# Altium PCB a1200_keyboard_adapter.PcbDoc
Units mil, origin at the board's own origin, x right, y up, seen from the top; angles counter-clockwise.
Board outline 1181.1 x 984.25 mil, 2 copper layers (Top Layer, Bottom Layer); 5 components, 9 nets, 63 pads, 4 vias.
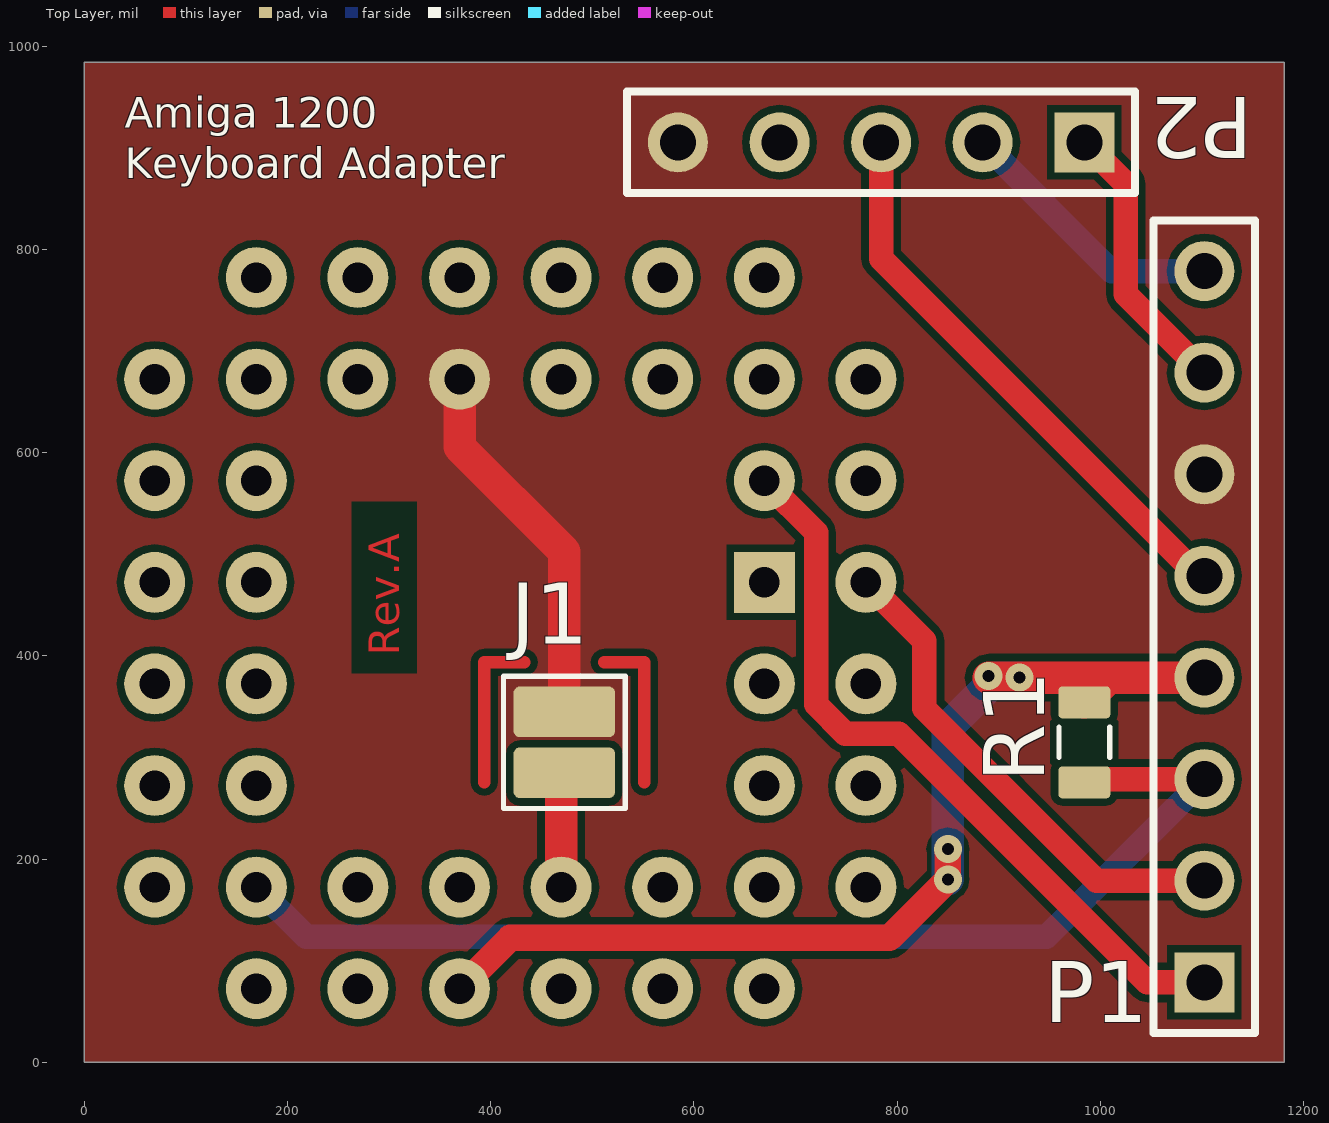
[diagram p0: Top Layer view]
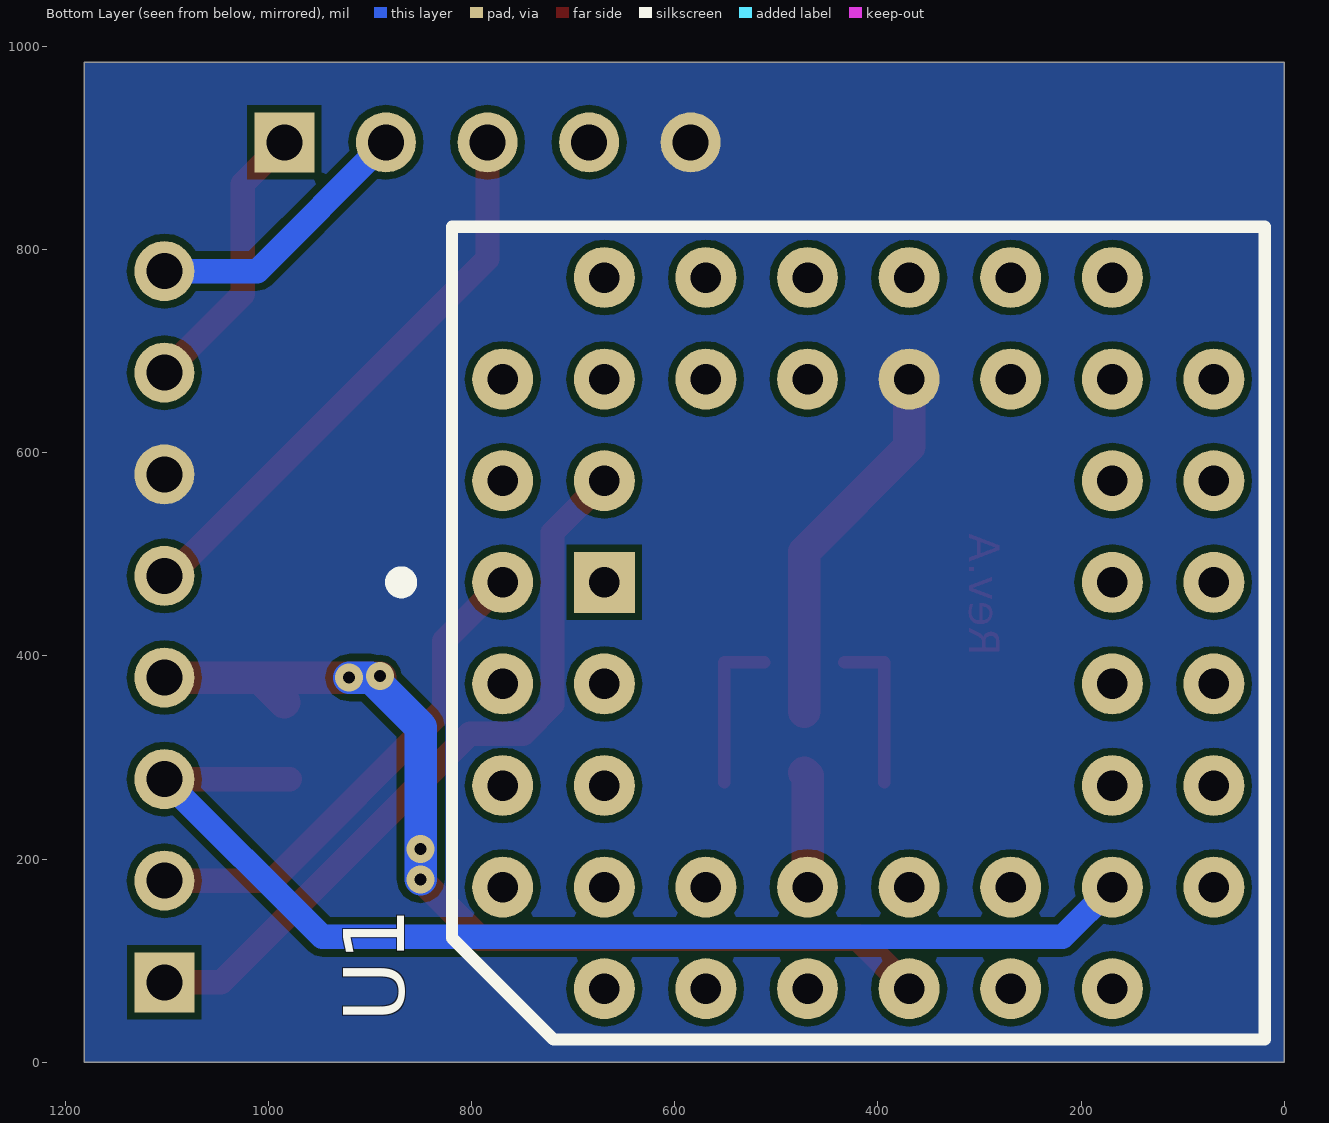
[diagram p1: Bottom Layer view, seen from below]

## Layer stack, top to bottom
Top Layer: signal copper 1.4
Dielectric: dielectric 12.6, FR-4, Dk 4.8
Bottom Layer: signal copper 1.4

## Board outline
0,0 0,984.25 1181.1,984.25 1181.1,0

## Design rules (kind name [scope] priority, off if disabled: settings)
Clearance [All] p1: gap=7
PolygonConnect [All] p1: connectstyle=Direct reliefconductorwidth=10 reliefentries=4 polygonreliefangle="90 Angle"
RoutingVias [All] p1: holewidth=28 width=50 viastyle="Through Hole" minholewidth=28 minwidth=50 maxholewidth=28 maxwidth=50
SilkscreenOverComponentPads [All] p1: minsilkscreentomaskgap=10
SolderMaskExpansion [All] p1: expansion=4
Width [All] p1: maxlimit=32 minlimit=10 preferedwidth=24
27 further rules are at their usual default settings.

## Components (designator, comment, footprint, x,y, rotation, side; value= is the part's Value field where it differs from the comment)
J1 "Jumper" JUMP1 472.44,314.96 r90 top
P1 "Amiga Keyboard" HDR1X8 1102.36,78.74 r90 top
P2 "LEDS" HDR1X5 984.25,905.51 r180 top
R1 "0805" RESC2012N_ZERO 984.25,314.96 r90 top
U1 "IC Socket" PLCC44_THD 669.29,472.44 r90 bottom locked

## Footprints (in the part's own frame and the unit in brackets; to place one, negate y for a bottom-side part, rotate by r counter-clockwise, add the part's x,y. Pads: shape width x height; smd on the part's side, far side on the other; paste and mask are expansions set on the pad)
HDR1X5 [mm] "Connector; Header; 5 Position"
  rect 1.5x1.5 hole 0.9: 1(0,0)
  round 1.5 hole 0.9: 2(2.54,0) 3(5.08,0) 4(7.62,0) 5(10.16,0)
  silkscreen extent -1.27,-1.27 11.43,1.27
HDR1X8 [mm] "Connector; Header; 8 Position"
  rect 1.5x1.5 hole 0.9: 1(0,0)
  round 1.5 hole 0.9: 2(2.54,0) 3(5.08,0) 4(7.62,0) 5(10.16,0) 6(12.7,0) 7(15.24,0) 8(17.78,0)
  silkscreen extent -1.27,-1.27 19.05,1.27
JUMP1 [mil] "SMT Battery jumper pads"
  rrect25% 50x100 smd: 1(-30,0) 2(30,0)
  rrect25% 118x108 on Top Solder: SM(0,0)
  silkscreen extent -65,-60 65,60
PLCC44_THD [mil]
  rect 60x60 hole 30: 1(0,0)
  round 60 hole 30: 2(-100,100) 3(-100,0) 4(-200,100) 5(-200,0) 6(-300,100) 7(-400,0) 8(-300,0) 9(-400,-100) 10(-300,-100) 11(-400,-200) 12(-300,-200) 13(-400,-300) 14(-300,-300) 15(-400,-400) 16(-300,-400) 17(-400,-500) 18(-300,-600) 19(-300,-500) 20(-200,-600) 21(-200,-500) 22(-100,-600) 23(-100,-500) 24(0,-600) 25(0,-500) 26(100,-600) 27(100,-500) 28(200,-600) 29(300,-500) 30(200,-500) 31(300,-400) 32(200,-400) 33(300,-300) 34(200,-300) 35(300,-200) 36(200,-200) 37(300,-100) 38(200,-100) 39(300,0) 40(200,100) 41(200,0) 42(100,100) 43(100,0) 44(0,100)
  silkscreen extent -450,-650 350,208
RESC2012N_ZERO [mm]
  round 0.254 on Mech15: 0(0,0)
  rrect25% 0.8x1.3 smd: 1(-1,0) 2(1,0)
  Top Layer pour cut-out: -0.725,0.65 -0.525,0.85 0.525,0.85 0.725,0.65 0.725,-0.65 0.525,-0.85 -0.525,-0.85 -0.725,-0.65
  silkscreen extent -0.38,-0.64 0.38,0.64, body extent -1.1,-0.67 1.1,0.68, height 0.69

## Part data
J1: library part JUMP1, "SMD jumper"
P1: library part "Header 8", "Header, 8-Pin"
P2: library part "Header 5", "Header, 5-Pin"
R1: library part RES_0R_0805, "Resistor SMD chip 0.0 Ohm 0.125W 0805"
U1: library part IC_SOCKET_44, "44-pin IC socket"

## Via types
v1: diameter 27.56, hole 11.81, Top Layer to Bottom Layer, tented both sides, 4 vias

## Nets (pads, with @x,y where several pads share a name; then routed paths per layer and width w, separated by ;. In a path a pad name is that pad's centre, name@x,y a point inside that pad or via, vN(x,y) a via of type N, cw(c..) or ccw(c..) an arc to the next point about the centre after c; other vN are vias at no path point)
FDDLED: P1.8 P2.2 | length 270.6
  Bottom Layer w24: P2.2 1011.02,778.74 P1.8
GND: J1.2 P1.6 P2.5 U1.34 | length 370.2
  Top Layer w32: U1.34 369.29,605.71 472.44,502.56 J1.2
HDDLED: P1.5 P2.3 | length 562.1
  Top Layer w24: P2.3 784.25,790.75 1096.26,478.74 P1.5
KBCLOCK: P1.1 U1.43 | length 736.7
  Top Layer w24: U1.43 720.29,521.44 720.29,352.14 748.99,323.44 801.56,323.44 1046.26,78.74 P1.1
KBDATA: P1.2 U1.44 | length 493.8
  Top Layer w24: U1.44 826.77,414.96 826.77,348.23 996.26,178.74 P1.2
KBRESET: P1.3 R1.1 U1.19 | length 1141.3
  Top Layer w24: R1.1@978.74,278.74 P1.3
  Bottom Layer w24: U1.19 218.29,123.44 947.06,123.44 P1.3
NetJ1_1: J1.1 U1.12 | length 113.8
  Top Layer w32: U1.12 469.29,281.81 J1.1
PWRLED: P1.7 P2.1 | length 275.7
  Top Layer w24: P2.1 1025,864.76 1025,756.1 P1.7
VCC: P1.4 R1.2 U1.13 | length 1042.8
  Top Layer w26: U1.13 419.29,122.44 792.44,122.44 v1(850,180) v1(850,210)
  Top Layer w32: v1@890,378.74 v1(920.47,378.74) 1008.66,378.74 ; R1.2 1008.66,378.74 ; P1.4 1008.66,378.74
  Bottom Layer w32: v1(850,180) 850,330 898.74,378.74 v1(920.47,378.74)
  other v1: 890,380
pads on no net: J1.SM P2.4 R1.0 U1.1 U1.2 U1.3 U1.4 U1.5 U1.6 U1.7 U1.8 U1.9 U1.10 U1.11 U1.14 U1.15 U1.16 U1.17 U1.18 U1.20 U1.21 U1.22 U1.23 U1.24 U1.25 U1.26 U1.27 U1.28 U1.29 U1.30 U1.31 U1.32 U1.33 U1.35 U1.36 U1.37 U1.38 U1.39 U1.40 U1.41 U1.42
copper on no net: | length 315
  Top Layer w12: 393.7,275.59 393.7,393.7 433.07,393.7 ; 511.81,393.7 551.18,393.7 551.18,275.59

## Polygon pours and split planes (outlines as drawn)
GND on Top Layer "Top Layer-No Net" (solid, remove dead copper, pour order 2): 0,0 1181.1,0 1181.1,984.25 0,984.25
GND on Bottom Layer "Top Layer-No Net" (solid, remove dead copper, pour order 4): 0,0 1181.1,0 1181.1,984.25 0,984.25

## Other copper
Top Layer:
  text "Rev.A" at 310,400 h30 r90

## Silkscreen, mask and mechanical layers (free items; w line width, h text height)
Top Overlay:
  text "Amiga 1200" at 40,920 h30
  text "Keyboard Adapter" at 40,870 h30
Mechanical 1:
  the board outline again, w12